# Altium PCB lm7805.PcbDoc
Units mil, origin at the board's own origin, x right, y up, seen from the top; angles counter-clockwise.
Board outline 2305 x 1120 mil, 2 copper layers (Top Layer, Bottom Layer); 10 components, 4 nets, 22 pads, 0 vias.
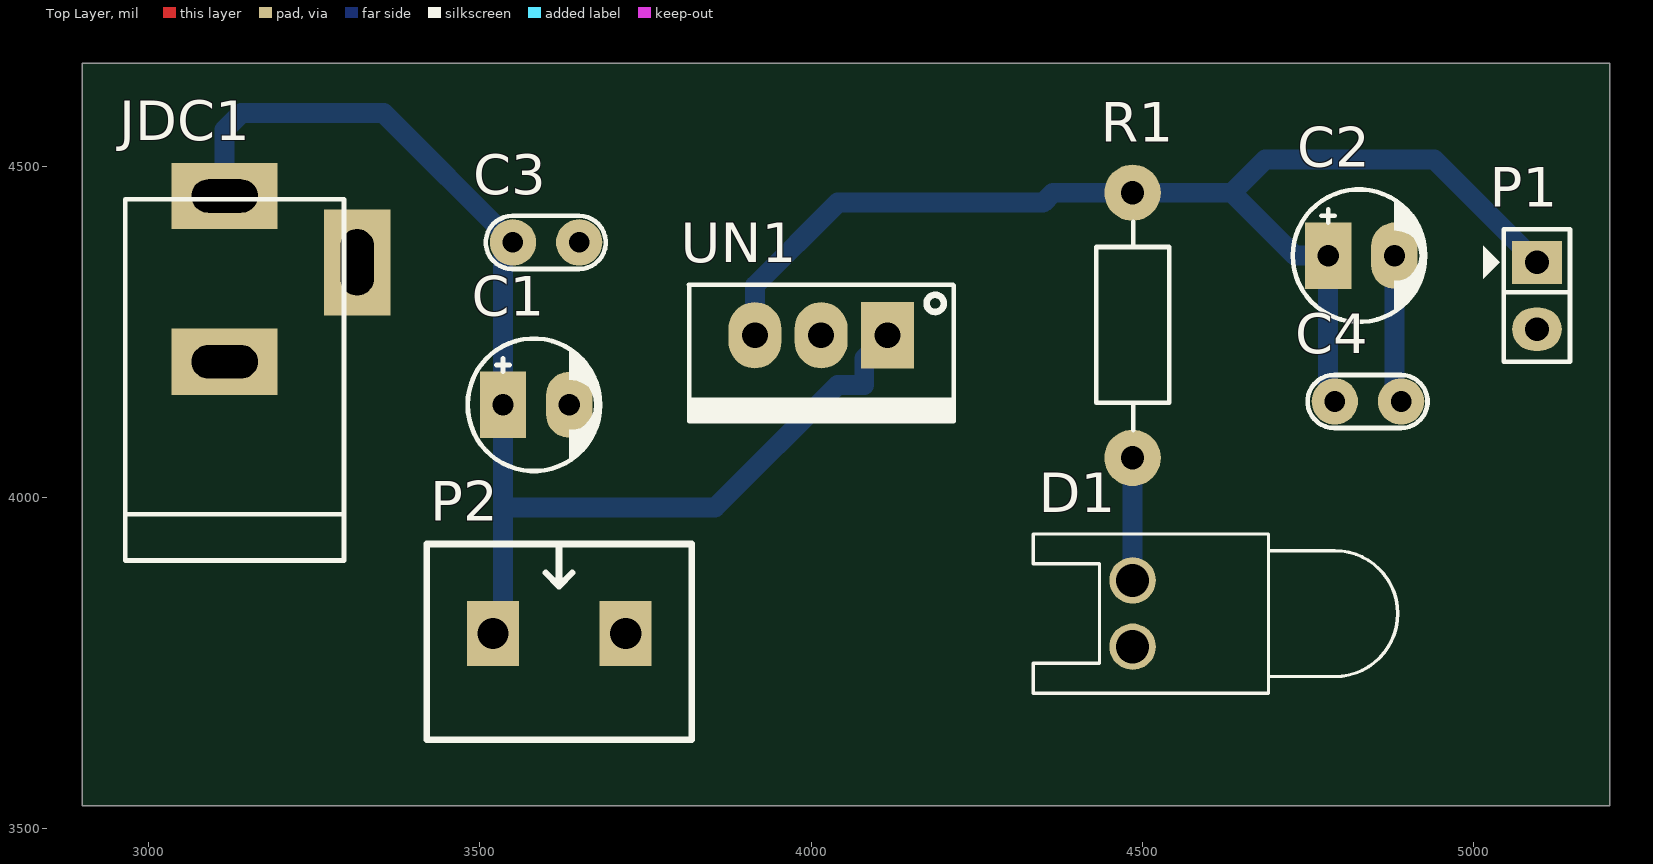
[diagram p0: Top Layer view]
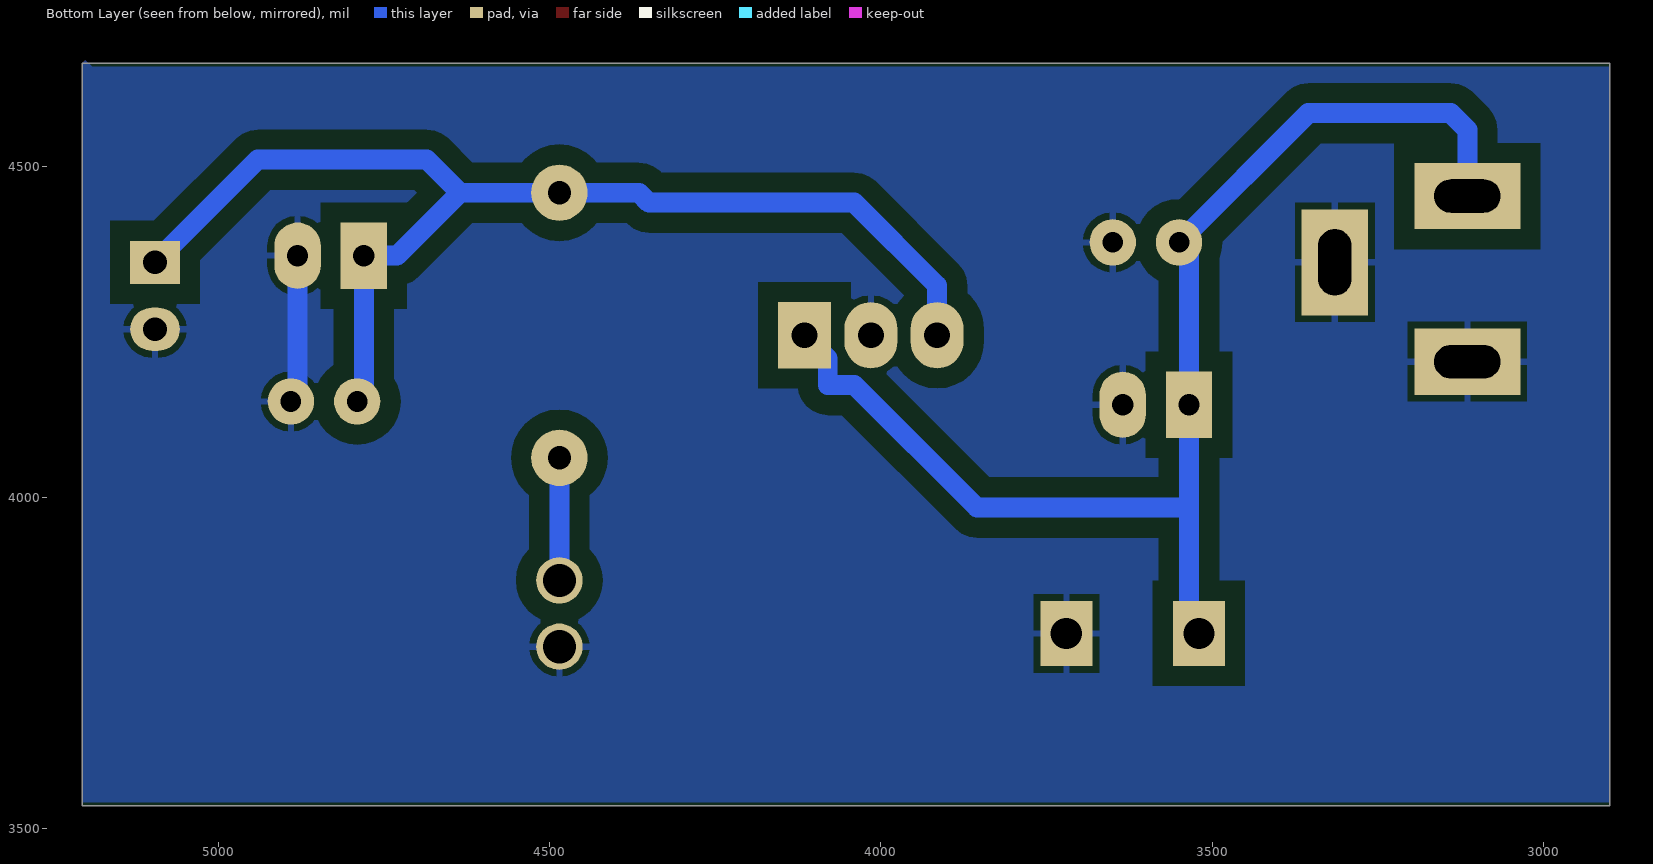
[diagram p1: Bottom Layer view, seen from below]
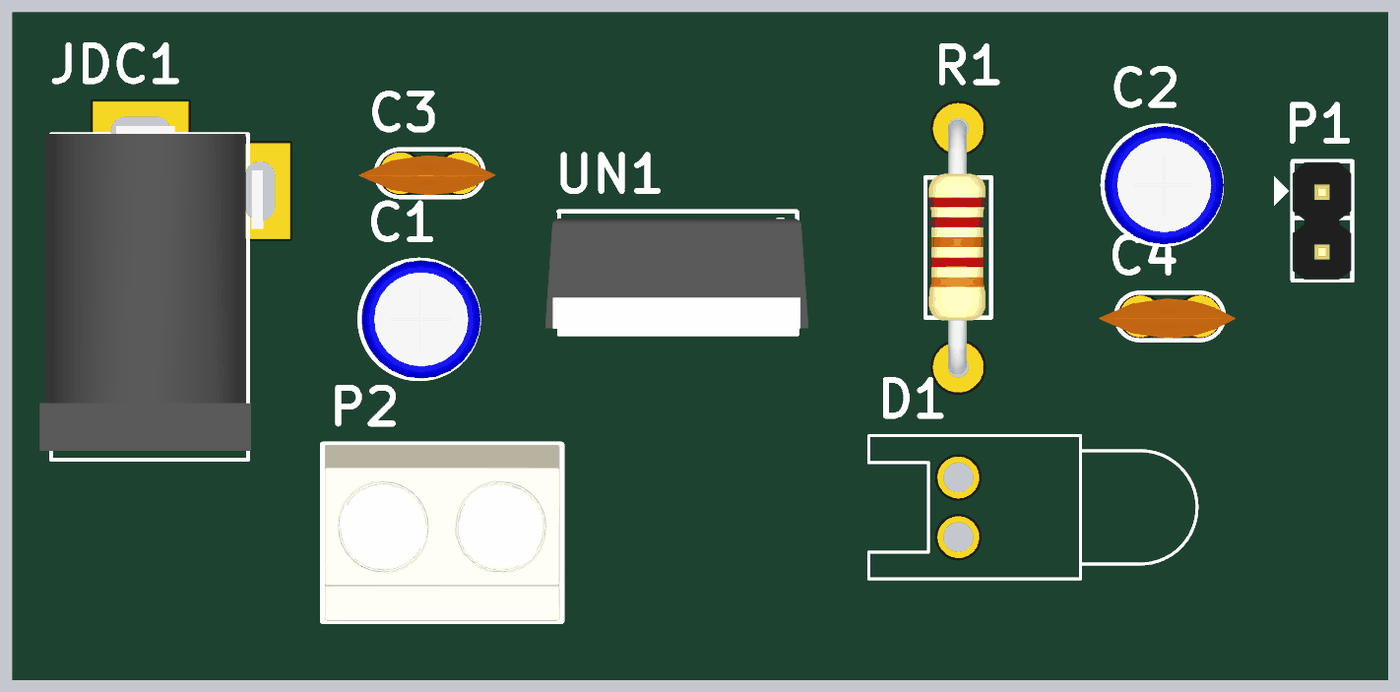
[diagram p2: 3D render of the assembled board from above, using the file's embedded part models]

## Layer stack, top to bottom
Top Solder: solder mask 0.4, Solder Resist, Dk 3.5
Top Layer: signal copper 1.4
Dielectric 1: dielectric 12.6, FR-4, Dk 4.8
Bottom Layer: signal copper 1.4
Bottom Solder: solder mask 0.4, Solder Resist, Dk 3.5

## Board outline
2900,3535 5205,3535 5205,4655 2900,4655

## Design rules (kind name [scope] priority, off if disabled: settings)
Clearance [All] p1: gap=30
PolygonConnect [All] p1: connectstyle=Relief reliefconductorwidth=10 reliefentries=4 polygonreliefangle="90 Angle" airgapwidth=10
RoomDefinition lm7805 [InComponentClass('lm7805')] p1: confinementstyle=ConfineIn formatcopy=TRUE lockcomponents=FALSE outline 7185,2635 9460,2635 9460,3355 7185,3355
RoutingVias [All] p1: holewidth=28 width=50 viastyle="Through Hole" minholewidth=28 minwidth=50 maxholewidth=28 maxwidth=50
SolderMaskExpansion [All] p1: expansion=4
Width [All] p1: maxlimit=30 minlimit=10 preferedwidth=20 minimp=50.000000 maximp=50.000000 favimp=50.000000
30 further rules are at their usual default settings.

## Components (designator, comment, footprint, x,y, rotation, side; value= is the part's Value field where it differs from the comment)
C1 "Cap Pol" CP1/2 3535,4140 r0 top
C2 "Cap Pol" CP1/2 4780,4365 r0 top
C3 "Cap Non-Pol" CN1 3650,4385 r180 top
C4 "Cap Non-Pol" CN1 4890,4145 r180 top
D1 "LED0" LED-0 4485,3825 r90 top
JDC1 "Jack DC" DC-IN 3215,4330 r90 top
P1 "Header 2" JP2 5095,4355 r270 top
P2 "Domino 2" "DOMINO 2- 5mm" 3620,3795 r0 top
R1 "RESISTOR" "RES 1/2W" 4485,4060 r90 top
UN1 "LM7805" QTO-220 4115,4245 r180 top

## Footprints (in the part's own frame and the unit in brackets; to place one, negate y for a bottom-side part, rotate by r counter-clockwise, add the part's x,y. Pads: shape width x height; smd on the part's side, far side on the other; paste and mask are expansions set on the pad)
CN1 [mil]
  round 70 hole 31: 1(0,0) 2(100,0)
  silkscreen extent -40,-40 141,40, body extent -60,-30 170,37, height 265
CP1/2 [mil] "Tu hoa < 22uF/16>50V"
  rect 70x100 hole 32: 1(0,0)
  oval 70x100 hole 32: 2(100,0)
  silkscreen extent -53,-100 147,100, body extent -49,-99 149,99, height 287
DC-IN [mil] "Jac DC input"
  rect 100x160 hole 50 slot 100 at 90 deg: 1(125,100) 2(-125,100)
  rect 160x100 hole 50 slot 100 at 0 deg: 3(25,-100)
  silkscreen extent -425,-80 120,250, body extent -410,-105 134,269, height 434
"DOMINO 2- 5mm" [mm]
  rect 2x2.5 hole 1.2: 1(-2.54,0) 2(2.54,0)
  silkscreen extent -5.08,-4.08 5.08,3.43, body extent -5,-4.07 5,3.43, height 10
JP2 [mil]
  rect 65x75 hole 36: 1(0,0)
  oval 65x75 hole 36: 2(101,0)
  silkscreen extent -50,-81 150,50, body extent -48,-50 148,48, height 323
LED-0 [mil] "LED; 2 Leads"
  round 70 hole 50: 1(50,0) 2(-50,0)
  silkscreen extent -120,-400 120,150
QTO-220 [mil] "TO-220 - 1-2-3"
  rect 80x100 hole 39: 1(0,0)
  oval 80x100 hole 39: 2(100,0) 3(200,0)
  silkscreen extent -100,-76 300,130, body extent -119,-64 322,121, height 755
"RES 1/2W" [mil] "R 1/2W, 2 pin, 300mil"
  round 85 hole 35: 1(0,0) 2(400,0)
  silkscreen extent 42,-55 356,55, body extent -12,-45 414,49, height 91

## Part data
C1 C2: "Polarized Capacitor (Radial)"
C3 C4: "Capacitor"
D1: "Typical INFRARED GaAs LED"
JDC1: "Jack DC input"
P1: "Header, 2-Pin"
P2: "Domino, 2-Pin"
R1: "Resistor"
UN1: "Positive Voltage Regulator"

## Nets (pads, with @x,y where several pads share a name; then routed paths per layer and width w, separated by ;. In a path a pad name is that pad's centre, name@x,y a point inside that pad or via, vN(x,y) a via of type N, cw(c..) or ccw(c..) an arc to the next point about the centre after c; other vN are vias at no path point)
12VDC: C1.1 C3.2 JDC1.1 P2.1 UN1.1 | length 1941.8
  Bottom Layer w30: JDC1.1 3115,4555 3140,4580 3355,4580 C3.2 3535,4370 C1.1 3535,3980 ; P2.1 3535,3810 3535,3980 ; UN1.1 4080,4210 4080,4170 4040,4170 3855,3985 3540,3985 3535,3980
GND: C1.2 C2.2 C3.1 C4.1 D1.2 JDC1.2 JDC1.3 P1.2 P2.2 UN1.2 | length 224.1
  Bottom Layer w30: C2.2 4880,4155 C4.1
NetC2_1: C2.1 C4.2 P1.1 R1.2 UN1.3 | length 1806.4
  Bottom Layer w30: UN1.3 3915,4320 4040,4445 4350,4445 4365,4460 R1.2 4635,4460 ; C4.2 4780,4155 C2.1 4730,4365 4635,4460 ; P1.1 4940,4510 4685,4510 4635,4460
NetD1_1: D1.1 R1.1 | length 185
  Bottom Layer w30: D1.1 R1.1

## Polygon pours and split planes (outlines as drawn)
GND on Bottom Layer "GND" (solid, pour order 2): 2900,4650 5190,4650 5200,4660 5205,4655 5205,3540 2900,3540 2900,4650